# Altium PCB ramps.PcbDoc (part 1 of 2)
Units mil, origin at the board's own origin, x right, y up, seen from the top; angles counter-clockwise.
Board outline 3937.01 x 2440.94 mil, 2 copper layers (Top Layer, Bottom Layer); 96 components, 138 nets, 478 pads, 27 vias.
Unrouted connection lines stored in the file: 1.
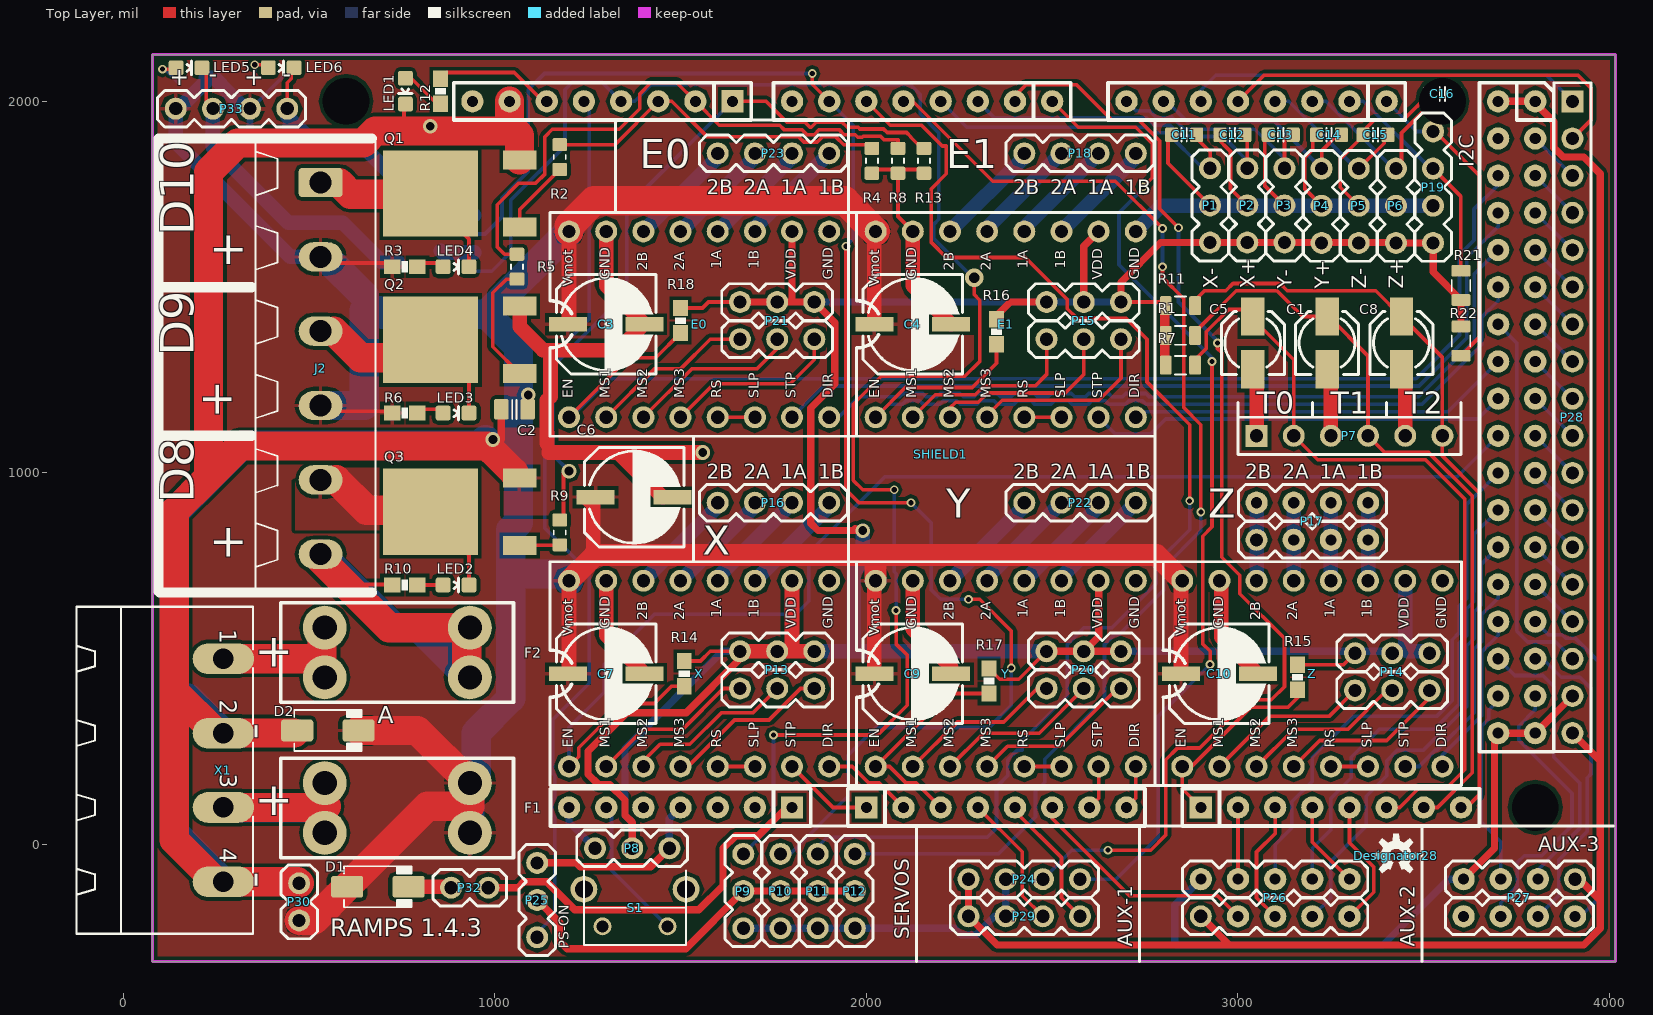
[diagram p0: Top Layer view]
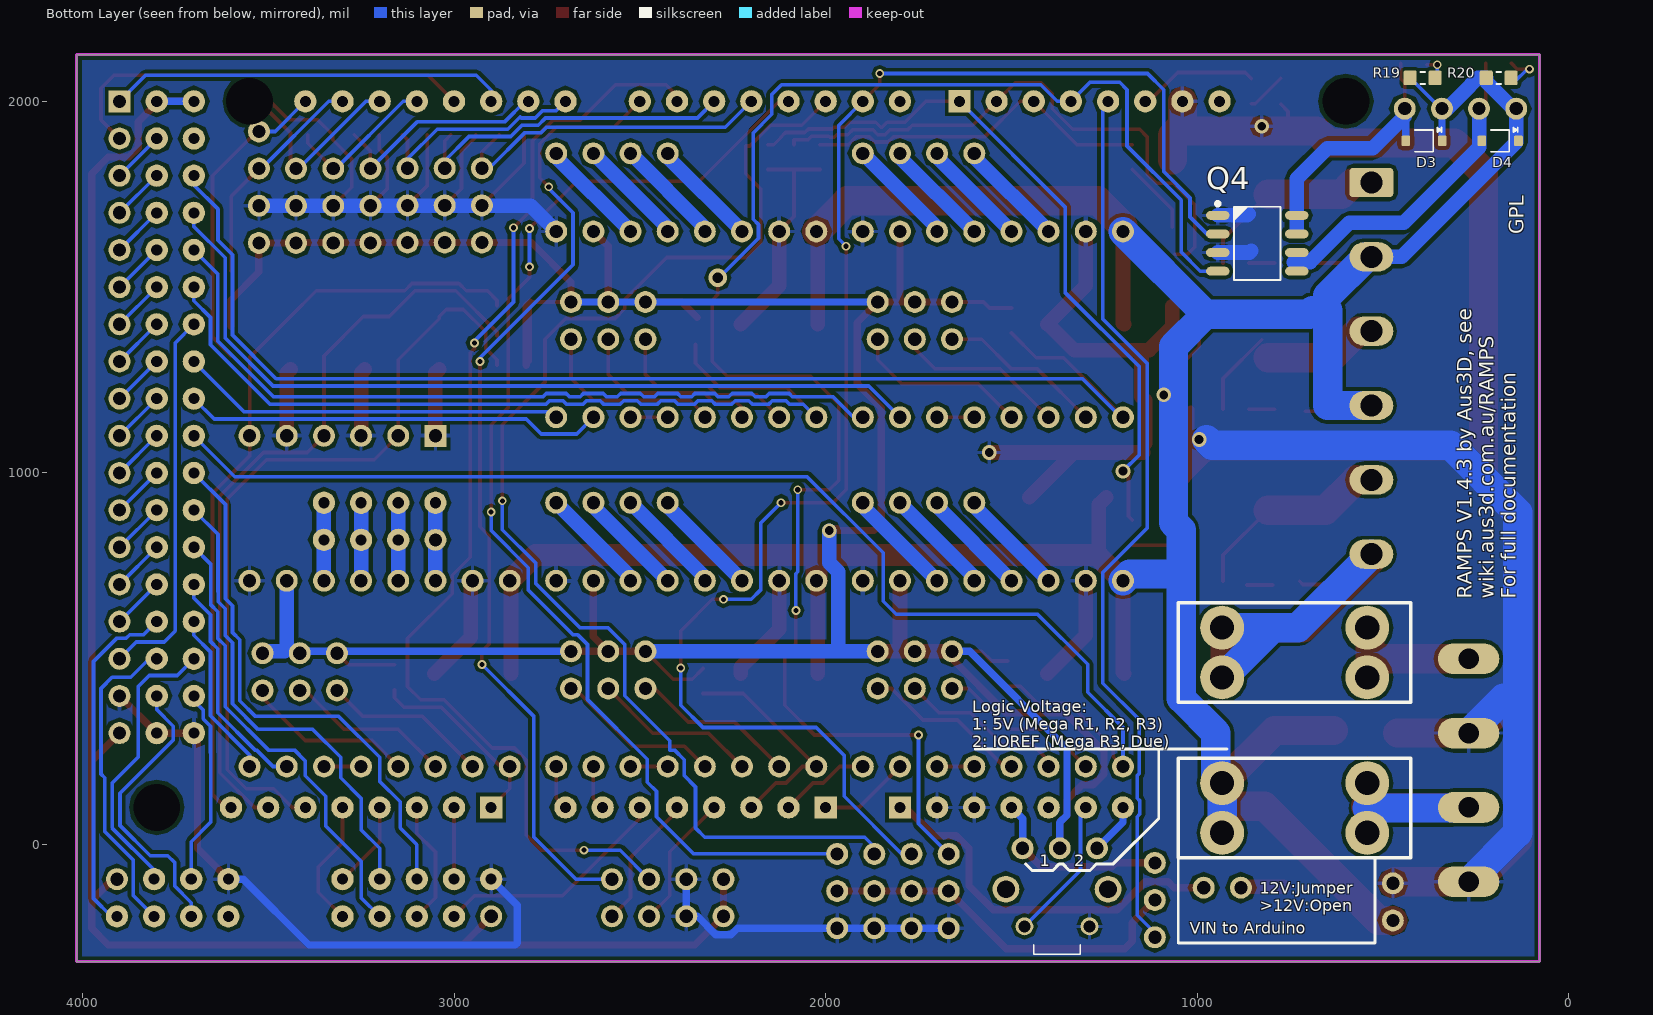
[diagram p1: Bottom Layer view, seen from below]

## Layer stack, top to bottom
Top Solder: solder mask 0.4, Solder Resist, Dk 3.5
Top Layer: signal copper 1.4
Dielectric1: dielectric 12.6, FR-4, Dk 4.8
Bottom Layer: signal copper 1.4
Bottom Solder: solder mask 0.4, Solder Resist, Dk 3.5

## Board outline
78.74,-314.96 4015.75,-314.96 4015.75,2125.98 78.74,2125.98

## Design rules (kind name [scope] priority, off if disabled: settings)
Clearance [All] p1: gap=9.84
ComponentClearance [All] p1: gap=1.97 collisioncheckmode=3 verticalgap=10 showdistances=FALSE
FabricationTestPointUsage TestPointUsage [All] p1: valid=0 allowmultiple=FALSE
FabricationTestpoint Testpoint [All] p1: side=3 testpointundercomponent=TRUE minsize=40 maxsize=100 preferedsize=60 minholesize=0 maxholesize=40 preferedholesize=32 testpointgrid=1 allowsidetop=TRUE allowsidebottom=TRUE usegrid=TRUE gridtolerance=0.01
HoleSize [All] p1: absolutevalues=TRUE maxlimit=137.8 minlimit=1 maxpercent=80.000 minpercent=20.000
PlaneConnect [All] p1: planeconnectstyle=Relief reliefexpansion=19.68 reliefentries=4 reliefconductorwidth=19.68 reliefairgap=9.84
PolygonConnect [All] p1: connectstyle=Relief reliefconductorwidth=10 reliefentries=4 polygonreliefangle="90 Angle" airgapwidth=10
RoutingVias [All] p1: holewidth=23.62 width=39.37 viastyle="Through Hole" minholewidth=15.75 minwidth=23.62 maxholewidth=39.37 maxwidth=78.74
SilkToSolderMaskClearance SilkscreenOverComponentPads [IsPad] p1: minsilkscreentomaskgap=10 clearancetoexposedcopper=TRUE
SolderMaskExpansion [All] p1: expansion=4
Width Width_1 [(InNet('+12V2') OR InNet('+12V') OR InNet('GND') OR InNet('NetF2_1'))] p1: maxlimit=196.85 minlimit=9.84 preferedwidth=39.37 minimp=50.000000 maximp=50.000000 favimp=50.000000
Width [All] p2: maxlimit=78.74 minlimit=9.84 preferedwidth=9.84 minimp=50.000000 maximp=50.000000 favimp=50.000000
24 further rules are at their usual default settings.

## Components (designator, comment, footprint, x,y, rotation, side; value= is the part's Value field where it differs from the comment)
C1 "10µ" 153CLV-0405 3240,1350 r90 top
C2 "approved sub OK" CAPC2012X135N 1053.15,1171.26 r180 top
C3 "100uF" "KEMET EDK107M035A9HAA" 1300,1400 r180 top
C4 "100uF" "KEMET EDK107M035A9HAA" 2125,1400 r180 top
C5 "10µ" 153CLV-0405 3040,1350 r90 top
C6 "100uF" "KEMET EDK107M035A9HAA" 1375,935 r180 top
C7 "100uF" "KEMET EDK107M035A9HAA" 1300,460 r180 top
C8 "10µ" 153CLV-0405 3440,1350 r90 top
C9 "100uF" "KEMET EDK107M035A9HAA" 2125,460 r180 top
C10 "100uF" "KEMET EDK107M035A9HAA" 2950,460 r180 top
C11 "approved sub OK" CAPC1608X90N 2855,1910 r0 top
C12 "approved sub OK" CAPC1608X90N 2985,1910 r0 top
C13 "approved sub OK" CAPC1608X90N 3115,1910 r0 top
C14 "approved sub OK" CAPC1608X90N 3245,1910 r0 top
C15 "approved sub OK" CAPC1608X90N 3370,1910 r0 top
C16 "approved sub OK" CAPC1608X90N 3550,2020 r0 top
D1 "100V; 1.5A" DO-214AC 685.35,-113.39 r0 top
D2 "100V; 1.5A" DO-214AC 551.18,307.09 r0 top
D3 "DIODE_75V_500mW" SOD323 389.76,1893.7 r0 bottom
D4 "DIODE_75V_500mW" SOD323 185.04,1893.7 r0 bottom
Designator28 "Comment" OSHW-LOGO-S 3425,-30 r0 top
E0 "A4988 Carrier" "A4988 CARRIER" 1200,1150 r0 top
E1 "A4988 Carrier" "A4988 CARRIER" 2025,1150 r0 top
F1 "Keystone Electronics 3568" "KEYSTONE ELECTRONICS 3568 FUSE HOLDER" 542.52,31.73 r0 top
F2 "Keystone Electronics 3568" "KEYSTONE ELECTRONICS 3568 FUSE HOLDER" 542.52,450 r0 top
J2 "6P_ScrewTerm_90S" 6P_PCB_ScrewTerm90S 531.5,1781.5 r180 top locked
LED1 "Blue LEDs for production use    Various blue LEDs stocked by SparkFun production 0603 - DIO-08575 Rebel - DIO-09553 1206 - DIO-09911" LED-0603 759.84,2027.56 r180 top
LED2 "Blue LEDs for production use    Various blue LEDs stocked by SparkFun production 0603 - DIO-08575 Rebel - DIO-09553 1206 - DIO-09911" LED-0603 895.67,698.66 r270 top
LED3 "Blue LEDs for production use    Various blue LEDs stocked by SparkFun production 0603 - DIO-08575 Rebel - DIO-09553 1206 - DIO-09911" LED-0603 895.67,1161.26 r270 top
LED4 "Blue LEDs for production use    Various blue LEDs stocked by SparkFun production 0603 - DIO-08575 Rebel - DIO-09553 1206 - DIO-09911" LED-0603 895.67,1554.96 r270 top
LED5 "Blue LEDs for production use    Various blue LEDs stocked by SparkFun production 0603 - DIO-08575 Rebel - DIO-09553 1206 - DIO-09911" LED-0603 177.17,2090.55 r270 top
LED6 "Blue LEDs for production use    Various blue LEDs stocked by SparkFun production 0603 - DIO-08575 Rebel - DIO-09553 1206 - DIO-09911" LED-0603 425.2,2090.55 r270 top
P1 "X-" "Header 3x1 Male" 2925,1820 r270 top
P2 "X+" "Header 3x1 Male" 3025,1820 r270 top
P3 "Y-" "Header 3x1 Male" 3125,1820 r270 top
P4 "Y+" "Header 3x1 Male" 3225,1819 r270 top
P5 "Z-" "Header 3x1 Male" 3325,1819 r270 top
P6 "Z+" "Header 3x1 Male" 3425,1819 r270 top
P7 "Header 6" HDR1X6 3050,1100 r0 top
P8 "X-" "Header 3x1 Male" 1470,-10 r180 top
P9 "Servo1" "HEADER 3X1 MALE" 1669,-225 r90 top
P10 "Servo1" "HEADER 3X1 MALE" 1769,-225 r90 top
P11 "Servo1" "HEADER 3X1 MALE" 1869,-225 r90 top
P12 "Servo1" "HEADER 3X1 MALE" 1969,-225 r90 top
P13 "Header 3X2" "Header 3x2 Male" 1660,420 r0 top
P14 "Header 3X2" "Header 3x2 Male" 3315,415 r0 top
P15 "Header 3X2" "Header 3x2 Male" 2485,1360 r0 top
P16 "X-MOT" "HEADER 4X1 MALE" 1600,920 r0 top
P17 "Header 4X2" "HEADER 4X2 MALE" 3050,820 r0 top
P18 "E1-MOT" "HEADER 4X1 MALE" 2425,1860 r0 top
P19 "I2C" "Header 4x1 Male" 3525,1619 r90 top
P20 "Header 3X2" "Header 3x2 Male" 2485,420 r0 top
P21 "Header 3X2" "Header 3x2 Male" 1660,1360 r0 top
P22 "Y-MOT" "HEADER 4X1 MALE" 2425,920 r0 top
P23 "E0-MOT" "HEADER 4X1 MALE" 1600,1860 r0 top
P24 "A-OUT" "Header 4x1 Male" 2275,-93 r0 top
P25 "Power" "Header 3x1 Male" 1114.17,-49.21 r270 top
P26 "Header 5X2" "Header 5x2 Male" 2900,-193 r0 top
P27 "Header 4X2" "HEADER 4X2 MALE" 3907,-93 r180 top
P28 "Header 18" HDR1X18 3900,2000 r270 top
P29 "SERIAL" "Header 4x1 Male" 2275,-193 r0 top
P30 "12V AUX-2" "Header 2x1 Male" 473.7,-204.09 r90 top
P32 "12V AUX-2" "Header 2x1 Male" 982.68,-115.91 r180 top
P33 "Fans" "Header 4x1 Male" 141.73,1980.31 r0 top
Q1 "IPD036N04L G" "IPD036N04L G" 826.77,1751.97 r0 top
Q2 "IPD036N04L G" "IPD036N04L G" 826.77,1358.27 r0 top
Q3 "IPD036N04L G" "IPD036N04L G" 826.77,895.67 r0 top
Q4 "MOSFET_AO4818B" SOIC127P600X175-8AN 838.58,1618.11 r180 bottom
R1 "Thick Film" RESC2012X70N 2845,1370 r0 top
R2 "10R 0603" RESC1608X55N 1175,1850 r90 top
R3 "1.8K 0603" 0603-RES 757.87,1554.96 r0 top
R4 "100K 0603" RESC1608X55N 2015,1840 r90 top
R5 "10R 0603" RESC1608X55N 1060,1555 r90 top
R6 "1.8K 0603" 0603-RES 757.87,1161.26 r0 top
R7 "Thick Film" RESC2012X70N 2845,1290 r0 top
R8 "100K 0603" RESC1608X55N 2085,1840 r90 top
R9 "10R 0603" RESC1608X55N 1175,840 r90 top
R10 "1.8K 0603" 0603-RES 757.87,698.66 r0 top
R11 "Thick Film" RESC2012X70N 2845,1450 r0 top
R12 "1K 0603" 0603-RES 854.33,2027.56 r270 top
R13 "100K 0603" RESC1608X55N 2155,1840 r90 top
R14 "10K 0603" 0603-RES 1510,460 r90 top
R15 "10K 0603" 0603-RES 3160,450 r90 top
R16 "10K 0603" 0603-RES 2350,1380 r90 top
R17 "10K 0603" 0603-RES 2330,440 r90 top
R18 "10K 0603" 0603-RES 1500,1410 r90 top
R19 "Thick Film" RESC1608X55N 393.7,2062.99 r180 bottom
R20 "Thick Film" RESC1608X55N 188.98,2062.99 r180 bottom
R21 "Thick Film" RESC2012X70N 3600,1505 r90 top
R22 "Thick Film" RESC2012X70N 3600,1355 r270 top
S1 "SW_THT_PB_4.3mm" FSMRACD 1240,-270 r0 top
SHIELD1 "Arduino Mega2560 R3" "ARDUINO MEGA SHIELD - NO TEXT" 0,0 r0 top locked
X "A4988 Carrier" "A4988 CARRIER" 1200,210 r0 top
X1 "Header 4Standard 4-pin 0.1\" header. Use with straight break away headers (SKU : PRT-00116), right angle break away headers (PRT-00553), swiss pins (PRT-00743), machine pins (PRT-00117), and female headers (PRT-00115). Molex polarized connector foot print use with SKU : PRT-08231 with associated crimp pins and housings. 1MM SMD Version SKU: PRT-10208" MSTBA4 69.69,200 r270 top
Y "A4988 Carrier" "A4988 CARRIER" 2025,210 r0 top
Z "A4988 Carrier" "A4988 CARRIER" 2850,210 r0 top

## Footprints (in the part's own frame and the unit in brackets; to place one, negate y for a bottom-side part, rotate by r counter-clockwise, add the part's x,y. Pads: shape width x height; smd on the part's side, far side on the other; paste and mask are expansions set on the pad)
6P_PCB_ScrewTerm90S [mm] "TERM BLOCK 6POS SIDE ENT STACKABLE 5.08MM"
  rrect25% 3x2 hole 1.5: 1(0,0)
  oval 3x2 hole 1.5: 2(0,5.08) 3(0,10.16) 4(0,15.24) 5(0,20.32) 6(0,25.4)
  silkscreen extent -3.75,-3.14 4.45,27.94, body extent -3.75,-3.14 4.45,27.94, height 10.02
153CLV-0405 [mil]
  rect 103x63 smd: +(71,0) -(-70.87,0)
  silkscreen extent -85,-85 85,85
0603-RES [mil]
  rect 44x40 smd: 1(-33.46,0) 2(34,0)
  silkscreen extent -9,-15 9,15
"A4988 CARRIER" [mm]
  round 1.5 hole 0.9: 1A(10.16,12.7) 1B(12.7,12.7) 2A(7.62,12.7) 2B(5.08,12.7) DIR(17.78,0) ENABLE(0,0) GND(2.54,12.7) GND2(17.78,12.7) MS1(2.54,0) MS2(5.08,0) MS3(7.62,0) RESET(10.16,0) SLEEP(12.7,0) STEP(15.24,0) VDD(15.24,12.7) VMOT(0,12.7)
  silkscreen extent -1.3,-1.3 19.1,14, body extent -1.27,-1.27 19.05,13.97, height 8.5
"ARDUINO MEGA SHIELD - NO TEXT" [mil]
  round 62.99 hole 125.98: 0(600,2000) 0(3550,2000) 0(3800,100)
  round 60 hole 30: 2(2300,2000) 3(2200,2000) 3V3(1400,100) 4(2100,2000) 5(2000,2000) 5V(1500,100) 5V(3700,2000) 5V(3800,2000) 6(1900,2000) 7(1800,2000) 9(1540,2000) 10(1440,2000) 11(1340,2000) 12(1240,2000) 13(1140,2000) 22(3700,1900) 23(3800,1900) 24(3700,1800) 25(3800,1800) 26(3700,1700) 27(3800,1700) 28(3700,1600) 29(3800,1600) 30(3700,1500) 31(3800,1500) 32(3700,1400) 33(3800,1400) 34(3700,1300) 35(3800,1300) 36(3700,1200) 37(3800,1200) 38(3700,1100) 39(3800,1100) 40(3700,1000) 41(3800,1000) 42(3700,900) 43(3800,900) 44(3700,800) 45(3800,800) 46(3700,700) 47(3800,700) 48(3700,600) 49(3800,600) 50(3700,500) 51(3800,500) 52(3700,400) 53(3800,400) A1(2100,100) A2(2200,100) A3(2300,100) A4(2400,100) A5(2500,100) A6(2600,100) A7(2700,100) A9(3000,100) A10(3100,100) A11(3200,100) A12(3300,100) A13(3400,100) A14(3500,100) A15(3600,100) AREF(940,2000) GND(1040,2000) GND(1600,100) GND(1700,100) GND(3700,300) GND(3800,300) IOREF(1200,100) RESET(1300,100) RX0(2500,2000) RX1(3200,2000) RX2(3000,2000) RX3(2800,2000) SCL(3400,2000) SDA(3300,2000) TX0(2400,2000) TX1(3100,2000) TX2(2900,2000) TX3(2700,2000)
  rect 60x60 hole 30: 8(1640,2000) A0(2000,100) A8(2900,100) VIN(1800,100)
  silkscreen extent 890,50 3850,2050, body extent -250,-2 4000,2102, height 518
CAPC1608X90N [mm] "Chip Capacitor, Body 1.6x0.8mm, EIA 0603, IPC Medium Density"
  round 0.254 on Mech15: 0(0,0)
  rrect25% 0.9x1 smd: 1(-0.85,0) 2(0.85,0)
  Top Layer pour cut-out: -0.6,0.5 -0.4,0.7 0.4,0.7 0.6,0.5 0.6,-0.5 0.4,-0.7 -0.4,-0.7 -0.6,-0.5
  silkscreen extent -0.18,-0.48 0.18,0.48, body extent -0.85,-0.45 0.85,0.45, height 0.89
CAPC2012X135N [mm] "Chip Capacitor, Body 2.0x1.2mm, EIA 0805, IPC Medium Density"
  round 0.254 on Mech15: 0(0,0)
  rrect25% 1x1.4 smd: 1(-0.9,0) 2(0.9,0)
  Top Layer pour cut-out: -0.675,0.7 -0.475,0.9 0.475,0.9 0.675,0.7 0.675,-0.7 0.475,-0.9 -0.475,-0.9 -0.675,-0.7
  silkscreen extent -0.15,-0.65 0.15,0.65, body extent -1.1,-0.72 1.1,0.73, height 1.34
DO-214AC [mm] "JEDEC DO214 variation AC. SMA"
  round 0.508 on Mech15: 0(0,0)
  rrect25% 2.2x1.5 smd: A(-2.1,0) K(2.1,0)
  silkscreen extent -2.3,-1.4 2.3,1.4, body extent -2.6,-1.3 2.6,1.3, height 2.42
FSMRACD [mil] "FSMRACD"
  round 48 hole 32: 1(50,50) 2(225,50)
  round 72 hole 48: GND1(0,150) GND2(275,150)
  silkscreen extent 0,0 275,200
HDR1X6 [mm] "Connector; Header; 6 Position"
  rect 1.5x1.5 hole 0.9: 1(0,0)
  round 1.5 hole 0.9: 2(2.54,0) 3(5.08,0) 4(7.62,0) 5(10.16,0) 6(12.7,0)
  silkscreen extent -1.27,-1.27 13.97,1.27
HDR1X18 [mm] "Connector; Header; 18 Position"
  rect 1.5x1.5 hole 0.9: 1(0,0)
  round 1.5 hole 0.9: 2(2.54,0) 3(5.08,0) 4(7.62,0) 5(10.16,0) 6(12.7,0) 7(15.24,0) 8(17.78,0) 9(20.32,0) 10(22.86,0) 11(25.4,0) 12(27.94,0) 13(30.48,0) 14(33.02,0) 15(35.56,0) 16(38.1,0) 17(40.64,0) 18(43.18,0)
  silkscreen extent -1.27,-1.27 44.45,1.27
"Header 2x1 Male" [mm]
  round 1.5 hole 0.9: 1(0,0) 2(2.54,0)
  silkscreen extent -1.25,-1.25 3.79,1.25, body extent -1.27,-1.24 3.81,1.24, height 8.34
"Header 3x1 Male" [mm]
  round 1.5 hole 0.9: 1(0,0) 2(2.54,0) 3(5.08,0)
  silkscreen extent -1.25,-1.25 6.33,1.25, body extent -1.27,-1.24 6.35,1.24, height 8.34
"HEADER 3X1 MALE" [mm]
  round 1.5 hole 0.9: 1(0,0) 2(2.54,0) 3(5.08,0)
  silkscreen extent -1.25,-1.25 6.33,1.25, body extent -1.27,-1.24 6.35,1.24, height 8.34
"Header 3x2 Male" [mm]
  round 1.5 hole 0.9: 1(0,0) 2(0,2.54) 3(2.54,0) 4(2.54,2.54) 5(5.08,0) 6(5.08,2.54)
  silkscreen extent -1.25,-1.25 6.33,3.79, body extent -1.24,-1.25 6.32,3.83, height 8.34
"HEADER 4X1 MALE" [mm]
  round 1.5 hole 0.9: 1(0,0) 2(2.54,0) 3(5.08,0) 4(7.62,0)
  silkscreen extent -1.25,-1.25 8.87,1.25, body extent -1.27,-1.24 8.89,1.24, height 8.34
"Header 4x1 Male" [mm]
  round 1.5 hole 0.9: 1(0,0) 2(2.54,0) 3(5.08,0) 4(7.62,0)
  silkscreen extent -1.25,-1.25 8.87,1.25, body extent -1.27,-1.24 8.89,1.24, height 8.34
"HEADER 4X2 MALE" [mil]
  round 59.06 hole 35.43: 1(0,0)
  round 60 hole 30: 2(0,100) 3(100,0) 4(100,100) 5(200,0) 6(200,100) 7(300,0) 8(300,100)
  silkscreen extent -49,-49 349,149, body extent -50,-49 350,149, height 328
"Header 5x2 Male" [mil]
  round 59.06 hole 35.43: 1(0,0)
  round 60 hole 30: 2(0,100) 3(100,0) 4(100,100) 5(200,0) 6(200,100) 7(300,0) 8(300,100) 9(400,0) 10(400,100)
  silkscreen extent -49,-49 449,149, body extent -49,-49 449,151, height 328
"IPD036N04L G" [mm]
  rect 6.5x5.9 smd: D(0,0)
  rect 2.3x1.3 smd: G(6.1,-2.3) S(6.1,2.3)
  body extent -3.15,-3.35 7.2,3.35, height 2.4
"KEMET EDK107M035A9HAA" [mm]
  rect 2.6x1 smd: 1(2.625,0) 2(-2.625,0)
  silkscreen extent -3.4,-3.4 3.4,3.4, body extent -3.4,-3.4 3.4,3.4, height 8
"KEYSTONE ELECTRONICS 3568 FUSE HOLDER" [mm]
  round 3 hole 1.65: 1(0,0) 1(0,3.4) 2(9.92,0) 2(9.92,3.4)
  silkscreen extent -3,-1.7 12.9,5.1
LED-0603 [mil]
  rrect30% 40x40 smd: A(0,-34.53) C(0,35)
  silkscreen extent -18,-6 19,7
MSTBA4 [mil] "MSTBA4"
  oval 82.5x165 hole 55: 1(-300,200) 2(-100,200) 3(100,200) 4(300,200)
  silkscreen extent -440,-195 440,280
OSHW-LOGO-S [mil]
  silkscreen extent -59,-47 59,59
RESC1608X55N [mm] "Chip Resistor, Body 1.6x0.8mm, EIA 0603, IPC Medium Density"
  round 0.254 on Mech15: 0(0,0)
  rrect25% 0.9x1 smd: 1(-0.85,0) 2(0.85,0)
  Top Layer pour cut-out: -0.6,0.5 -0.4,0.7 0.4,0.7 0.6,0.5 0.6,-0.5 0.4,-0.7 -0.4,-0.7 -0.6,-0.5
  silkscreen extent -0.15,-0.41 0.15,0.41, body extent -0.87,-0.47 0.88,0.48, height 0.54
RESC2012X70N [mm] "Chip Resistor, Body 2.0x1.2mm, EIA 0805, IPC Medium Density"
  round 0.254 on Mech15: 0(0,0)
  rrect25% 0.8x1.3 smd: 1(-1,0) 2(1,0)
  Top Layer pour cut-out: -0.725,0.65 -0.525,0.85 0.525,0.85 0.725,0.65 0.725,-0.65 0.525,-0.85 -0.525,-0.85 -0.725,-0.65
  silkscreen extent -0.38,-0.64 0.38,0.64, body extent -1.1,-0.67 1.1,0.68, height 0.69
SOD323 [mm] "SOD-323; 2 Leads; Body 1.8 x 1.35 mm, (LxW)"
  round 0.508 on Mech15: 0(0,0)
  rrect25% 0.6x0.7 smd: A(1.25,0) K(-1.25,0)
  silkscreen extent -1.2,-0.9 0.64,0.75, body extent -1.3,-0.68 1.3,0.67, height 1.1
SOIC127P600X175-8AN [mm] "SOIC, 8-Leads, Body 4.9x3.9mm, Pitch 1.27mm, IPC Medium Density"
  round 1 on Mech15: 0(0,0)
  oval 1.6x0.6 smd: 1(-2.7,1.905) 2(-2.7,0.635) 3(-2.7,-0.635) 4(-2.7,-1.905) 5(2.7,-1.905) 6(2.7,-0.635) 7(2.7,0.635) 8(2.7,1.905)
  silkscreen extent -2.83,-2.5 1.6,2.82, body extent -3,-2.45 3,2.45, height 1.75

## Part data
C1 C5 C8: library part CAPE_10u_100V_SMD, "Capacitor SMD Electrolytic 10uF 20% 100V Radial"
C2: library part CAPC_100n_0805_X7R_50V_10%, "Capacitor SMD Cer 100nF 10% 50V X7R 0805"
C3 C4 C6 C7 C9 C10: library part "Cap Pol1", "Polarized Capacitor (Radial)"
C11 C12 C13 C14 C15 C16: library part CAPC_100n_0603_X7R_50V_10%, "Capacitor SMD Cer 100nF 10% 50V X7R 0603"
D1 D2: library part DIODE_100V_1.5A_SMA, "Diode SMD 100V 1.5A SMA"
D3 D4: "Diode SMD 300mA 0.5W SOD323"
F1 F2: library part "Fuse 1", "Fuse"
J2: "TERM BLOCK 6POS SIDE ENT STACKABLE 5.08MM"
LED1 LED2 LED3 LED4 LED5 LED6: library part LED-BLUE0603
P1 P2 P3 P4 P5 P6 P8 P9 P10 P11 P12 P25: library part "Header 3", "Header, 3-Pin"
P7: "Header, 6-Pin"
P13 P14 P15 P20 P21: "Header, 3-Pin, Dual row"
P16 P18 P19 P22 P23 P24 P29 P33: library part "Header 4", "Header, 4-Pin"
P17 P27: "Header, 4-Pin, Dual row"
P26: "Header, 5-Pin, Dual row"
P28: "Header, 18-Pin"
P30 P32: library part "Header 2", "Header, 2-Pin"
Q4: "MOSFET Dual-Channel 30V 8.5A SOIC-8 SMD"
R1 R7 R11 R21 R22: library part RES_4K7_0805_1%, "Resistor SMD chip 4.7k Ohm 0.125W 1% 0805"
R2 R3 R4 R5 R6 R8 R9 R10 R12 R13 R14 R15 R16 R17 R18: library part 1KOHM-1/10W-1%(0603)
R19 R20: library part RES_330R_0603_5%, "Resistor SMD chip 330 Ohm 0.1W 5% 0603"
S1: "Switch, tact, 4.3mm stem"
X1: library part M04SCREW

## Via types
v1: diameter 23.62, hole 13.78, Top Layer to Bottom Layer, 20 vias
v2: diameter 39.37, hole 23.62, Top Layer to Bottom Layer, 6 vias
v3: diameter 50, hole 28, Top Layer to Bottom Layer, 1 vias

## Nets (pads, with @x,y where several pads share a name; then routed paths per layer and width w, separated by ;. In a path a pad name is that pad's centre, name@x,y a point inside that pad or via, vN(x,y) a via of type N, cw(c..) or ccw(c..) an arc to the next point about the centre after c; other vN are vias at no path point)
3.3V: SHIELD1.3V3
5V: P8.1 P24.1 P25.1 P26.1 P27.1 P28.18 P29.1 SHIELD1.5V | length 5207.1
  Top Layer w19.68: P25.1@1102.36,-49.21 1219.21,-49.21 1230,-60 1420,-60 P8.1@1470,-10 ; P24.1@2275,-93 P29.1@2275,-193 2352,-270 2977,-270 ; P26.1@2900,-193 2977,-270 ; SHIELD1.5V@3695,2000 SHIELD1.5V@3700,2000 SHIELD1.5V@3800,2000 3800,1995 3850,1945 3850,1875 3875,1850 3930,1850 3975,1805 3975,225 ; P28.18@3900,300 3975,225 ; P27.1@3907,-93 3918,-93 3975,-150 ; 2977,-270 3930,-270 3975,-225 3975,-150 ; 3975,-150 3975,225
  Bottom Layer w19.68: P8.1@1470,-10 1470,70 SHIELD1.5V@1500,100 ; SHIELD1.5V@3700,2000 SHIELD1.5V@3800,2000
+12V: C2.1 C3.1 C4.1 C6.1 C7.1 C9.1 C10.1 D1.A D2.K D3.K D4.K E0.VMOT E1.VMOT F1.2 J2.2 J2.4 P30.1 P33.1 P33.3 R3.1 R6.1 R19.1 R20.1 X.VMOT Y.VMOT Z.VMOT | length 9511.2
  Top Layer w9.84: J2.4@526.5,1166.5 R6.1@709.17,1166.5 ; J2.2@531.5,1581.5 548.03,1564.96 R3.1@724.41,1564.96
  Top Layer w19.68: C2.1@1088.58,1171.26 1089.84,1170 1090,1170.16 v2(1090,1210)
  Top Layer w39.37: C7.1@1196.65,460 1200,463.35 X.VMOT@1200,710 ; C3.1@1196.65,1400 1200,1403.35 E0.VMOT@1200,1650 ; C6.1@1245.08,935.04 1265,915.12 1265,775 ; C9.1@2021.65,460 2021.65,706.65 Y.VMOT@2025,710 ; C4.1@2021.65,1400 2021.65,1647.64 E1.VMOT@2024.02,1650 ; C10.1@2846.65,460 2846.65,706.65 Z.VMOT@2850,710
  Top Layer w59.06: X.VMOT@1200,710 1268.9,778.9 2025,778.9 ; Y.VMOT@2025,710 2025,778.9 ; Z.VMOT@2850,710 2781.1,778.9 2025,778.9
  Top Layer w78.74: P30.1@473.7,-204.09 511.97,-204.09 D1.A@602.68,-113.39 819.37,103.31 933.07,103.31 F1.2@933.07,165.59 791.57,307.09 D2.K@633.86,307.09 ; E0.VMOT@1200,1650 1200,1665 1267.28,1732.28 1941.73,1732.28 E1.VMOT@2024.02,1650
  Bottom Layer w9.84: P33.1@141.73,1976.38 141.73,1982.28 R20.1@222.44,2062.99 ; P33.3@341.73,1976.38 341.73,1977.56 R19.1@427.17,2062.99
  Bottom Layer w19.68: D3.K@340.55,1893.7 341.73,1894.88 P33.3@341.73,1976.38 ; P33.3@341.73,1977.56 P33.3@341.73,1980.31
  Bottom Layer w39.37: R20.1@222.44,2053.36 145.46,1976.38 141.73,1976.38 141.73,1889.76 450,1581.5 J2.2@531.5,1581.5 ; R20.1@222.44,2062.99 244.69,2062.99 285.43,2022.25 331.3,1976.38 P33.3@341.73,1976.38
  Bottom Layer w78.74: J2.4@531.5,1181.5 649.21,1181.5 649.21,1437.01 ; J2.2@544.49,1581.5 649.21,1476.77 ; 688.98,1437.01 698.82,1427.17 977.17,1427.17 ; F1.2@933.07,31.73 F1.2@933.07,165.59 950,182.52 950,300.39 1043.31,393.7 1043.31,728.35 ; X.VMOT@1200,710 1181.65,728.35 1043.31,728.35 ; E0.VMOT@1200,1650 977.17,1427.17 ; 977.17,1427.17 1063.9,1340.43 1063.9,867.05 1043.31,846.46 1043.31,728.35
+12V2: F2.2 J2.6 R10.1 | length 1435.8
  Top Layer w9.84: J2.6@517.72,781.5 J2.6@531.5,767.72 ; 599.21,700 715.75,700 R10.1@724.41,708.66
  Top Layer w78.74: J2.6@531.5,781.5 531.5,767.72 599.21,700 715.35,583.86 925,583.86 F2.2@925,450
  Bottom Layer w78.74: J2.6@531.5,781.5 729.13,583.86 796.69,583.86 ; F2.2@930.55,450 796.69,583.86 ; F2.2@930.55,583.86 796.69,583.86
A3: P29.3 SHIELD1.A3 | length 365.5
  Top Layer w9.84: SHIELD1.A3@2300,100 2419.29,-19.29 2419.29,-137.29 P29.3@2475,-193
A4: P29.4 SHIELD1.A4 | length 365.5
  Top Layer w9.84: SHIELD1.A4@2400,100 2400,90 2525,-35 2525,-143 P29.4@2575,-193
A5: P26.3 SHIELD1.A5 | length 638.9
  Top Layer w9.84: SHIELD1.A5@2500,100 2500,70 2707.76,-137.76 2944.76,-137.76 P26.3@3000,-193
A9: P26.4 SHIELD1.A9 | length 193
  Top Layer w9.84: P26.4@3000,-93 SHIELD1.A9@3000,100
A10: P26.5 SHIELD1.A10 | length 334.4
  Top Layer w9.84: P26.5@3100,-193 3050,-143 3050,-20 3100,30 SHIELD1.A10@3100,100
A11: P26.10 SHIELD1.A11 | length 234.4
  Top Layer w9.84: SHIELD1.A11@3200,100 3200,7 P26.10@3300,-93
A12: P26.9 SHIELD1.A12 | length 346.8
  Top Layer w9.84: P26.9@3300,-193 3365,-128 3365,-60 3300,5 SHIELD1.A12@3300,100
AM-VIN: P32.1 SHIELD1.VIN | length 1028.4
  Top Layer w19.68: P32.1@982.68,-115.91 1062.56,-115.91 1078.46,-100 1140,-100 1215.68,-175.68 1549.32,-175.68 1614.4,-110.6 1614.4,-10 1648.62,24.21 1709.21,24.21 1785,100 SHIELD1.VIN@1800,100
AREF: SHIELD1.AREF
D0: P24.4 SHIELD1.RX0 | length 2663.4
  Top Layer w9.84: SHIELD1.RX0@2500,2000 2570,1930 2725,1930 2769.29,1885.71 2769.29,1794.29 v1(2745,1770) ; v1(2925,485) 2925,520 2905,540 2905,830 2930,855 v1(2930,1300)
  Bottom Layer w9.84: P24.4@2575,-93 2672,-93 2785,20 2785,345 v1(2925,485) ; v1(2745,1770) 2750,1770 2680,1700 2680,1560 2930,1310 v1(2930,1300)
D1: P24.3 SHIELD1.TX0 | length 3070.3
  Top Layer w9.84: SHIELD1.TX0@2400,2000 2400,2015 2430,2045 2565,2045 2660.32,1949.68 2733.15,1949.68 2788.98,1893.86 2788.98,1711.02 v1(2840,1660) ; v1(2650,-15) 2765,-15 2805.71,25.71 2805.71,228.35 2837.36,260 2897.16,260 3026.85,389.68 3089.68,389.68 3125,425 3125,555 3005,675 3005,725 2956.57,773.43 2956.57,1323.43 2945,1335 v1(2945,1350)
  Bottom Layer w9.84: P24.3@2475,-93 2553,-15 v1(2650,-15) ; v1(2840,1660) 2840,1460 2945,1355 v1(2945,1350)
D4: P12.3 SHIELD1.4 | length 3183.5
  Top Layer w9.84: SHIELD1.4@2100,2000 2125,2000 2340,1785 2670,1785 v1(2796.85,1658.15) ; v1(2796.85,1554.65) 2796.85,1525.98 2853.86,1468.98 2853.86,1176.14 2900,1130 v1(2900,895)
  Bottom Layer w9.84: P12.3@1969,-25 2355,-25 2455.24,75.24 2455.24,143.31 2480,168.07 2480,230 2640.71,390.71 2640.71,538.35 2666.65,564.29 2679.29,564.29 2800,685 2800,745 2900,845 v1(2900,895) ; v1(2796.85,1554.65) v1(2796.85,1658.15)
D5: P11.3 SHIELD1.5 | length 3394.4
  Top Layer w9.84: SHIELD1.5@2000,2000 2064.37,1935.63 2148.52,1935.63 2204.15,1880 2215,1880 2215,1805 2175,1765 2175,1620 2215,1580 2427.64,1580 2540.71,1466.93 2540.71,1441.65 2566.65,1415.71 2699.29,1415.71 2755,1360 2755,1245 2870,1130 v1(2870,925)
  Bottom Layer w9.84: P11.3@1869,-25 1869,-6 1895,20 2325,20 2350,45 2350,155 2380.71,185.71 2380.71,228.35 2406.65,254.29 2419.29,254.29 2419.29,279.29 2540.71,400.71 2540.71,538.35 2586.34,583.98 2661.61,583.98 2780.32,702.68 2780.32,757.84 2870,847.52 v1(2870,925)
D6: P10.3 Q4.2 SHIELD1.6 | length 4187.6
  Top Layer w9.84: v1(1854.33,2074.8) 1854.33,2045.67 SHIELD1.6@1900,2000 ; v1(1945,1610) 1945,955 1980,920 v1(2120,920) ; v1(2275,660) 2305,660 2390,575 v1(2390,475)
  Bottom Layer w9.84: Q4.2@937.61,1643.11 973.82,1643.11 1019.68,1688.98 1019.68,1740.16 1090.55,1811.02 1090.55,2031.5 1133.86,2074.8 v1(1854.33,2074.8) ; P10.3@1769,-25 1795,-25 1950,130 1950,240 2025,315 2330,315 2390,375 v1(2390,475) ; SHIELD1.6@1900,2000 1965,1935 1965,1630 v1(1945,1610) ; v1(2120,920) 2175,865 2175,685 2200,660 v1(2275,660)
D7: SHIELD1.7
D8: R9.2 R13.2 SHIELD1.8 | length 1941.5
  Top Layer w9.84: R9.2@1175,873.46 1185,883.46 1185,1000 1195,1010 v2(1200,1005) ; SHIELD1.8@1640,2000 1730,2000 1786.34,1943.66 1834.65,1943.66 1848.31,1930 1851.69,1930 1865.35,1943.66 1934.65,1943.66 1948.31,1930 1978.01,1930 1983.01,1925 1983.64,1925.63 2046.36,1925.63 2056.04,1915.94 2108.21,1915.94 2119.45,1904.7 2119.45,1903.7 2139.69,1883.46 R13.2@2155,1883.46
  Bottom Layer w9.84: v2(1200,1005) 1155.71,1049.29 1155.71,1285.71 1355.71,1485.71 1355.71,1715.71 SHIELD1.8@1640,2000
D9: R5.2 R8.2 SHIELD1.9 | length 1561.5
  Top Layer w9.84: R5.2@1060,1588.46 1026.54,1588.46 1006.89,1608.11 1006.89,1721.89 1065,1780 1110.63,1780 1135,1804.37 1135,1905 1155,1925 1335,1925 1390,1980 1390,2020 1420,2050 1490,2050 SHIELD1.9@1540,2000 1604.45,1935.55 1766.61,1935.55 1778.18,1923.98 1826.5,1923.98 1840.16,1910.31 1859.84,1910.31 1873.5,1923.98 1926.5,1923.98 1940.16,1910.31 1969.86,1910.31 1977.02,1903.15 1989,1903.15 1991.79,1905.94 2038.21,1905.94 2047.89,1896.26 2085,1896.26 R8.2@2085,1883.46
D10: R2.2 R4.2 SHIELD1.10 | length 947.9
  Top Layer w9.84: R2.2@1175,1883.46 1323.46,1883.46 SHIELD1.10@1440,2000 1476.69,2000 1572.4,1904.29 1818.35,1904.29 1832.01,1890.63 1867.99,1890.63 1881.65,1904.29 1918.35,1904.29 1939.17,1883.46 R4.2@2015,1883.46
D11: P9.3 Q4.4 SHIELD1.11 | length 4513.7
  Top Layer w9.84: v1(1750,295) 2030,295 2110,375 2110,510 2080,540 v1(2080,630) ; v1(2075,955) 1990,955 1965,980 1965,1185 2040,1260 2265,1260 2305,1300 2305,1465 2290,1480 v3(2290,1525)
  Bottom Layer w9.84: Q4.4@944.88,1543.11 991.93,1543.11 1043.31,1594.49 1043.31,1734.27 1188.98,1879.94 1188.98,2031.5 1208.66,2051.18 1288.82,2051.18 SHIELD1.11@1340,2000 1376.69,2000 1421.46,2044.76 2118.54,2044.76 2144.76,2018.54 2144.76,1965.24 2195,1915 2195,1682.64 2180.71,1668.35 2180.71,1631.65 2272.36,1540 2305,1540 v3(2290,1525) ; P9.3@1669,-25 1750,56 v1(1750,295) ; v1(2075,955) 2075,734.05 2080.71,728.35 v1@2080.71,630.71
D16: P28.1 SHIELD1.TX2 | length 1075.6
  Bottom Layer w9.84: SHIELD1.TX2@2900,2000 2900,2030 2940,2070 3830,2070 P28.1@3900,2000
D17: P28.2 SHIELD1.RX2 | length 1149.2
  Top Layer w9.84: SHIELD1.RX2@3000,2000 3070,2070 3915,2070 3950,2035 3950,1950 P28.2@3900,1900
D22: SHIELD1.22
D23: P28.3 SHIELD1.23 | length 141.4
  Bottom Layer w9.84: SHIELD1.23@3800,1900 P28.3@3900,1800
D25: P28.4 SHIELD1.25 | length 141.4
  Bottom Layer w9.84: SHIELD1.25@3800,1800 P28.4@3900,1700
D27: P28.5 SHIELD1.27 | length 141.4
  Bottom Layer w9.84: SHIELD1.27@3800,1700 P28.5@3900,1600
D29: P28.6 SHIELD1.29 | length 141.4
  Bottom Layer w9.84: SHIELD1.29@3800,1600 P28.6@3900,1500
D31: P28.7 SHIELD1.31 | length 141.4
  Bottom Layer w9.84: SHIELD1.31@3800,1500 P28.7@3900,1400
D32: P28.16 SHIELD1.32 | length 1026.8
  Bottom Layer w9.84: SHIELD1.32@3700,1400 3750,1350 3750,575 3780,545 3855,545 P28.16@3900,500
D33: P28.8 SHIELD1.33 | length 141.4
  Bottom Layer w9.84: SHIELD1.33@3800,1400 P28.8@3900,1300
D35: P28.9 SHIELD1.35 | length 141.4
  Bottom Layer w9.84: SHIELD1.35@3800,1300 P28.9@3900,1200
D37: P28.10 SHIELD1.37 | length 141.4
  Bottom Layer w9.84: SHIELD1.37@3800,1200 P28.10@3900,1100
D39: P28.11 SHIELD1.39 | length 141.4
  Bottom Layer w9.84: SHIELD1.39@3800,1100 P28.11@3900,1000
D40: P26.6 SHIELD1.40 | length 1472.9
  Bottom Layer w9.84: P26.6@3100,-93 3100,0 3145,45 3145,115 3200,170 3200,235 3310,345 3534.32,345 3576.5,387.17 3576.5,551.16 3596.18,570.84 3596.18,643 3615,661.82 3615,915 SHIELD1.40@3700,1000
D41: P28.12 SHIELD1.41 | length 141.4
  Bottom Layer w9.84: SHIELD1.41@3800,1000 P28.12@3900,900
D42: P26.8 SHIELD1.42 | length 1286.3
  Bottom Layer w9.84: P26.8@3200,-93 3200,-10 3250,40 3250,125 3305,180 3305,235 3380,310 3527.16,310 3596.18,379.02 3596.18,543 3615.87,562.69 3615.87,634.85 3634.68,653.67 3634.68,679.68 3635,680 3635,835 SHIELD1.42@3700,900
D43: P28.13 SHIELD1.43 | length 141.4
  Bottom Layer w9.84: SHIELD1.43@3800,900 P28.13@3900,800
D44: P26.7 SHIELD1.44 | length 1241.1
  Bottom Layer w9.84: P26.7@3200,-193 3250,-143 3250,-45 3345,50 3345,130 3400,185 3400,225 3429.29,254.29 3499.29,254.29 3615.87,370.87 3615.87,534.85 3635.55,554.53 3635.55,626.7 3655,646.14 3655,755 SHIELD1.44@3700,800
D45: P28.14 SHIELD1.45 | length 141.4
  Bottom Layer w9.84: SHIELD1.45@3800,800 P28.14@3900,700
D47: P28.15 SHIELD1.47 | length 141.4
  Bottom Layer w9.84: SHIELD1.47@3800,700 P28.15@3900,600
D49: P27.2 SHIELD1.49 | length 935
  Bottom Layer w9.84: SHIELD1.49@3800,600 3835.32,564.68 3872.68,564.68 3881.65,555.71 3906.93,555.71 3970,492.64 3970,-145 3922,-193 P27.2@3907,-193
D53: P27.6 SHIELD1.53 | length 777.9
  Bottom Layer w9.84: P27.6@3707,-193 3707,-156.31 3751.76,-111.54 3751.76,-48.24 3770,-30 3817.16,-30 3898.58,51.42 3898.58,138.11 3755.24,281.46 3755.24,318.54 3800,363.31 SHIELD1.53@3800,400